# Altium PCB AT89S52多功能板.PcbDoc (part 2 of 5)
Units mm, origin at the board's own origin, x right, y up, seen from the top; angles counter-clockwise.
Board outline 152.4 x 101.6 mm, 2 copper layers (Top Layer, Bottom Layer); 140 components, 143 nets, 570 pads, 50 vias.
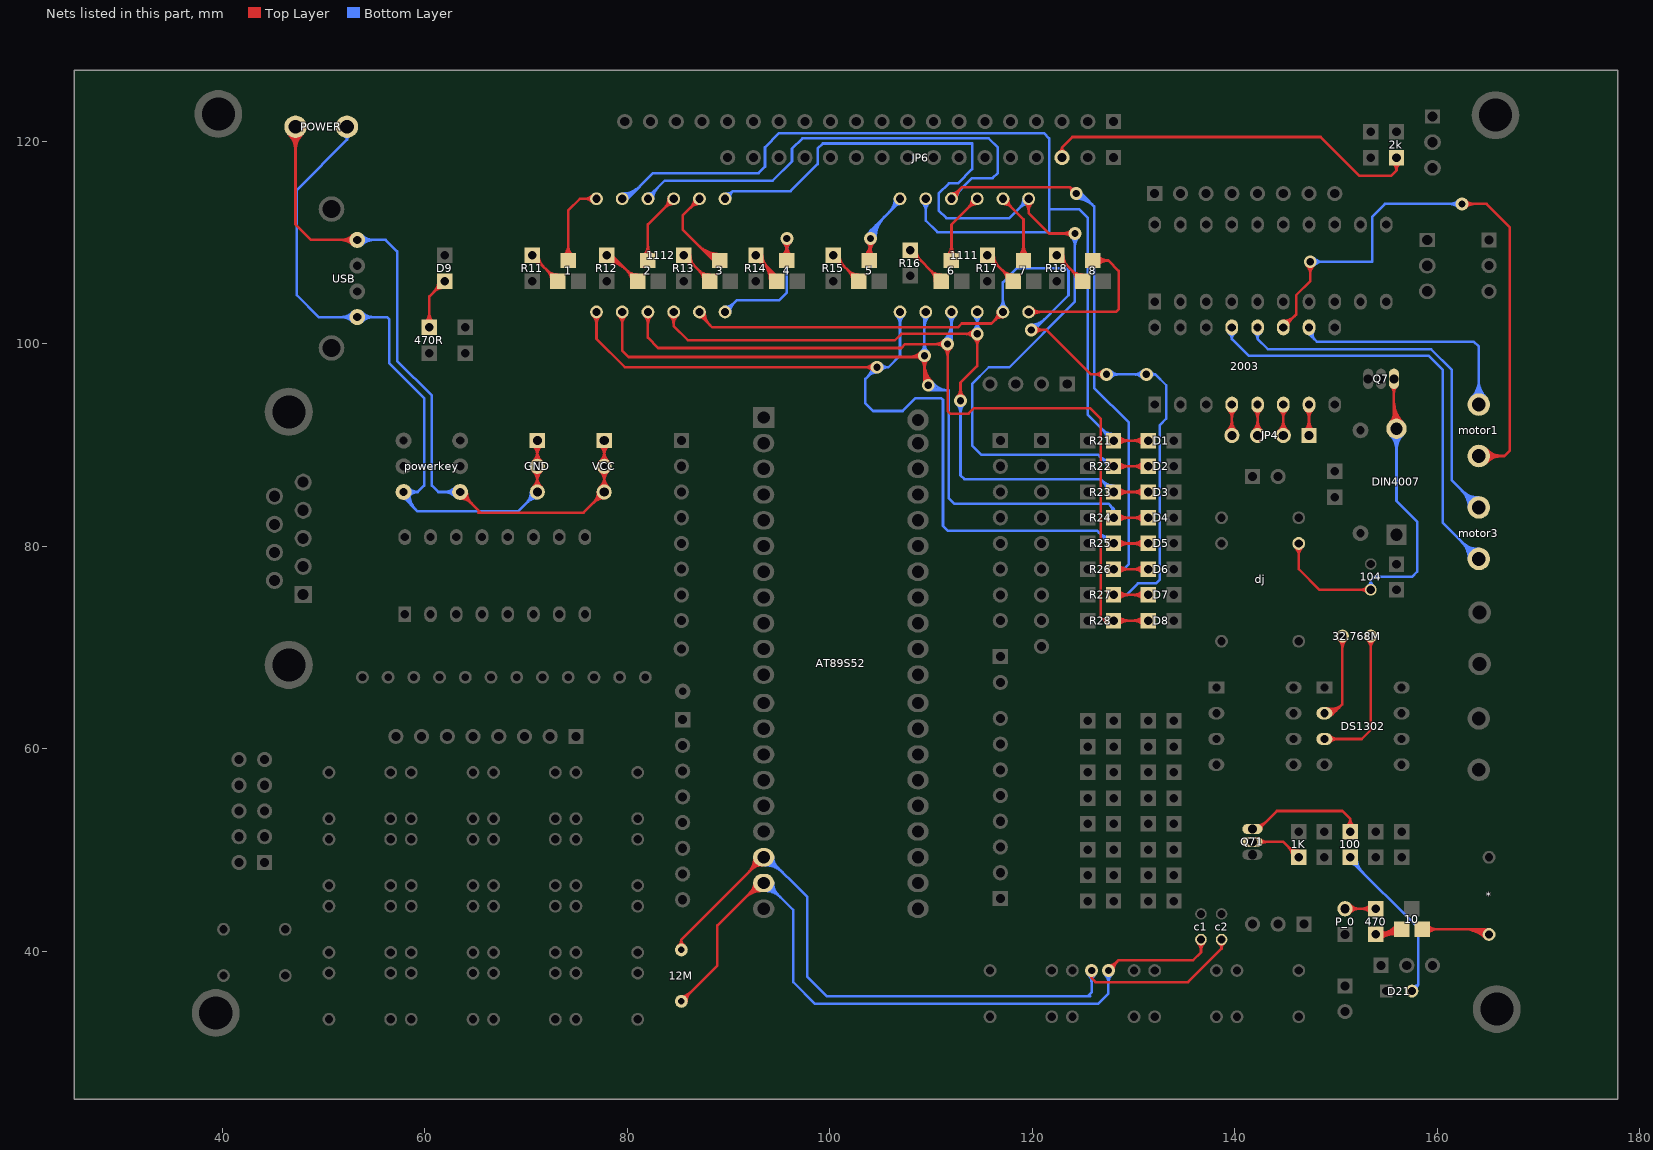
[diagram p2: the nets of this part, all layers, seen from the top]

## Via types
v1: diameter 1.27, hole 0.711, Top Layer to Bottom Layer, 50 vias

## Nets (pads, with @x,y where several pads share a name; then routed paths per layer and width w, separated by ;. In a path a pad name is that pad's centre, name@x,y a point inside that pad or via, vN(x,y) a via of type N, cw(c..) or ccw(c..) an arc to the next point about the centre after c; other vN are vias at no path point) (continued)
Net1_b: 1.B R11.2 | length 11.3
  Top Layer w0.254: R11.2@70.612,108.077 cw(c70.612,106.544) 71.696,107.628 cw(c72.78,108.712) R11.2@71.247,108.712 ; R11.2@70.612,108.331 cw(c70.612,107.411) 71.262,108.062 cw(c71.913,108.712) R11.2@70.993,108.712 ; R11.2@70.612,108.712 1.B@73.152,106.172 ; 1.B@72.517,106.172 ccw(c70.984,106.172) 72.068,107.256 ccw(c73.152,108.34) 1.B@73.152,106.807 ; 1.B@72.771,106.172 ccw(c71.851,106.172) 72.502,106.822 ccw(c73.152,107.473) 1.B@73.152,106.553
Net1_c: 1.C 1112.12 | length 14
  Top Layer w0.254: 1.C@73.719,108.653 ccw(c72.635,109.737) 74.168,109.737 ccw(c75.701,109.737) 1.C@74.617,108.653 ; 1.C@73.899,108.473 ccw(c73.248,109.124) 74.168,109.124 ccw(c75.088,109.124) 1.C@74.437,108.473 ; 1.C@74.168,108.204 74.168,113.157 75.311,114.3 1112.12@76.962,114.3 ; 1112.12@76.603,113.941 ccw(c75.736,113.074) 75.736,114.3 ccw(c75.736,115.526) 1112.12@76.603,114.659
Net1K_2: 1K.2 Q71.2 | length 10.5
  Top Layer w0.254: Q71.2@141.732,50.8 144.78,50.8 1K.2@146.304,49.276 ; Q71.2@142.496,50.536 cw(c143.132,49.9) 143.132,50.8 cw(c143.132,51.7) Q71.2@142.496,51.064 ; 1K.2@145.669,49.276 ccw(c144.136,49.276) 145.22,50.36 ccw(c146.304,51.444) 1K.2@146.304,49.911 ; 1K.2@145.923,49.276 ccw(c145.003,49.276) 145.654,49.926 ccw(c146.304,50.577) 1K.2@146.304,49.657
Net2_b: 2.B R12.2 | length 13
  Top Layer w0.254: R12.2@77.978,108.077 cw(c77.978,105.318) 79.929,107.269 ; R12.2@77.978,108.331 cw(c77.978,106.185) 79.496,107.702 ; R12.2@77.978,108.585 cw(c77.978,107.052) 79.062,108.136 ; R12.2@77.978,108.712 78.486,108.712 2.B@81.026,106.172 ; 2.B@80.391,106.172 ccw(c78.858,106.172) 79.942,107.256 ccw(c81.026,108.34) 2.B@81.026,106.807 ; 2.B@80.645,106.172 ccw(c79.725,106.172) 80.376,106.822 ccw(c81.026,107.473) 2.B@81.026,106.553
Net2_c: 2.C 1112.9 | length 12.9
  Top Layer w0.254: 2.C@81.593,108.653 ccw(c80.509,109.737) 82.042,109.737 ccw(c83.575,109.737) 2.C@82.491,108.653 ; 2.C@81.773,108.473 ccw(c81.122,109.124) 82.042,109.124 ccw(c82.962,109.124) 2.C@82.311,108.473 ; 2.C@82.042,108.204 82.042,111.76 1112.9@84.582,114.3 ; 1112.9@84.074,114.3 cw(c82.848,114.3) 83.715,113.433 cw(c84.582,112.566) 1112.9@84.582,113.792
Net2k_2: 2k.2 JP6.3 | length 41.6
  Top Layer w0.254: JP6.3@122.936,118.364 122.936,119.38 ; 2k.2@155.575,117.856 cw(c155.004,117.094) 155.956,117.094 ; 2k.2@155.956,118.364 155.956,117.094 ; 2k.2@156.337,117.856 ccw(c156.908,117.094) 155.956,117.094 ; 122.936,119.38 ccw(c123.453,119.38) 123.219,118.919 cw(c123.453,119.38) 122.936,119.38 ; 122.936,119.38 cw(c122.419,119.38) 122.653,118.919 ccw(c122.419,119.38) 122.936,119.38 ; 122.936,119.38 123.952,120.396 148.463,120.396 152.273,116.586 155.448,116.586 155.956,117.094
Net3_b: 3.B R13.2 | length 11.3
  Top Layer w0.254: R13.2@85.598,108.077 cw(c85.598,106.544) 86.682,107.628 cw(c87.766,108.712) R13.2@86.233,108.712 ; R13.2@85.598,108.331 cw(c85.598,107.411) 86.248,108.062 cw(c86.899,108.712) R13.2@85.979,108.712 ; R13.2@85.598,108.712 3.B@88.138,106.172 ; 3.B@87.503,106.172 ccw(c85.97,106.172) 87.054,107.256 ccw(c88.138,108.34) 3.B@88.138,106.807 ; 3.B@87.757,106.172 ccw(c86.837,106.172) 87.488,106.822 ccw(c88.138,107.473) 3.B@88.138,106.553
Net3_c: 3.C 1112.8 | length 17.3
  Top Layer w0.254: 1112.8@86.614,114.3 cw(c85.388,114.3) 86.255,113.433 cw(c87.122,112.566) 1112.8@87.122,113.792 ; 86.986,109.737 ccw(c89.154,111.905) 3.C@89.154,108.839 ; 1112.8@87.122,114.3 85.471,112.649 85.471,111.252 88.519,108.204 3.C@89.154,108.204 ; 87.42,109.303 ccw(c89.154,111.038) 3.C@89.154,108.585 ; 87.853,108.87 ccw(c89.154,110.171) 3.C@89.154,108.331 ; 88.287,108.436 ccw(c89.154,109.303) 3.C@89.154,108.077
Net4_b: 4.B R14.2 | length 12.8
  Top Layer w0.254: R14.2@92.71,108.077 cw(c92.71,106.544) 93.794,107.628 cw(c94.878,108.712) R14.2@93.345,108.712 ; R14.2@92.71,108.204 R14.2@92.71,108.712 94.742,106.68 4.B@94.742,106.172 ; R14.2@92.71,108.331 cw(c92.71,107.411) 93.36,108.062 cw(c94.011,108.712) R14.2@93.091,108.712 ; R14.2@93.299,108.123 cw(c91.348,106.172) 4.B@94.107,106.172 ; 93.732,107.69 cw(c92.215,106.172) 4.B@94.361,106.172 ; 94.166,107.256 cw(c93.082,106.172) 4.B@94.615,106.172
Net4_c: 4.C 1112.6 | length 24
  Top Layer w0.254: 4.C@95.309,108.653 ccw(c94.225,109.737) 95.758,109.737 ccw(c97.291,109.737) 4.C@96.207,108.653 ; v1@95.399,110.004 cw(c94.532,109.137) 95.758,109.137 cw(c96.984,109.137) v1@96.117,110.004 ; 4.C@95.489,108.473 ccw(c94.838,109.124) 95.758,109.124 ccw(c96.678,109.124) 4.C@96.027,108.473 ; 4.C@95.758,108.204 v1(95.758,110.363)
  Bottom Layer w0.254: 1112.6@89.662,103.124 90.805,104.267 94.996,104.267 95.758,105.029 v1(95.758,110.363) ; 1112.6@89.662,103.632 ccw(c89.662,104.858) 90.529,103.991 ccw(c91.396,103.124) 1112.6@90.17,103.124 ; v1@95.399,110.004 cw(c94.532,109.137) 95.758,109.137 cw(c96.984,109.137) v1@96.117,110.004
Net5_b: 5.B R15.2 | length 11.3
  Top Layer w0.254: R15.2@100.33,108.077 cw(c100.33,106.544) 101.414,107.628 cw(c102.498,108.712) R15.2@100.965,108.712 ; R15.2@100.33,108.331 cw(c100.33,107.411) 100.98,108.062 cw(c101.631,108.712) R15.2@100.711,108.712 ; R15.2@100.33,108.712 5.B@102.87,106.172 ; 5.B@102.235,106.172 ccw(c100.702,106.172) 101.786,107.256 ccw(c102.87,108.34) 5.B@102.87,106.807 ; 5.B@102.489,106.172 ccw(c101.569,106.172) 102.22,106.822 ccw(c102.87,107.473) 5.B@102.87,106.553
Net5_c: 5.C 1111.12 | length 23.7
  Top Layer w0.254: 5.C@103.437,108.653 ccw(c102.046,110.044) v1@104.013,110.044 ; 5.C@103.617,108.473 ccw(c102.66,109.43) 104.013,109.43 ccw(c105.112,109.43) 5.C@104.335,108.653 ; v1@103.654,110.004 cw(c102.787,109.137) 104.013,109.137 cw(c105.239,109.137) v1@104.372,110.004 ; 5.C@104.013,108.331 v1(104.013,110.363)
  Bottom Layer w0.254: v1@103.759,110.363 cw(c104.985,110.363) 104.118,111.23 ; v1@104.267,110.363 cw(c106.72,110.363) 104.985,112.097 ; v1@104.521,110.363 cw(c107.587,110.363) 105.419,112.531 ; 104.552,111.664 ccw(c105.853,110.363) v1(104.013,110.363) 104.013,111.125 ; 105.887,112.999 ccw(c104.586,114.3) 1111.12@106.426,114.3 ; 106.321,113.433 ccw(c105.454,114.3) 1111.12@106.68,114.3 ; 106.5,113.612 cw(c106.934,113.179) 1111.12@106.934,113.792 ; 1111.12@106.934,114.3 106.934,114.046 104.013,111.125 ; 104.013,111.125 ccw(c104.33,111.125) 104.208,110.832 cw(c104.33,111.125) 104.013,111.125 ; 104.013,111.125 cw(c103.696,111.125) 103.818,110.832 ccw(c103.696,111.125) 104.013,111.125
Net6_b: 6.B R16.2 | length 12
  Top Layer w0.254: R16.2@107.95,108.585 cw(c107.95,107.052) 109.034,108.136 cw(c110.118,109.22) R16.2@108.585,109.22 ; R16.2@107.95,108.839 cw(c107.95,107.919) 108.6,108.57 cw(c109.251,109.22) R16.2@108.331,109.22 ; R16.2@107.95,109.22 6.B@110.998,106.172 ; 6.B@110.363,106.172 ccw(c108.83,106.172) 109.914,107.256 ccw(c110.998,108.34) 6.B@110.998,106.807 ; 6.B@110.617,106.172 ccw(c109.697,106.172) 110.348,106.822 ccw(c110.998,107.473) 6.B@110.998,106.553
Net6_c: 6.C 1111.9 | length 12.9
  Top Layer w0.254: 6.C@111.565,108.653 ccw(c110.481,109.737) 112.014,109.737 ccw(c113.547,109.737) 6.C@112.463,108.653 ; 6.C@111.745,108.473 ccw(c111.094,109.124) 112.014,109.124 ccw(c112.934,109.124) 6.C@112.283,108.473 ; 6.C@112.014,108.204 112.014,111.76 1111.9@114.554,114.3 ; 1111.9@114.046,114.3 cw(c112.82,114.3) 113.687,113.433 cw(c114.554,112.566) 1111.9@114.554,113.792
Net7_b: 7.B R17.2 | length 11.3
  Top Layer w0.254: R17.2@115.57,108.077 cw(c115.57,106.544) 116.654,107.628 cw(c117.738,108.712) R17.2@116.205,108.712 ; R17.2@115.57,108.331 cw(c115.57,107.411) 116.22,108.062 cw(c116.871,108.712) R17.2@115.951,108.712 ; R17.2@115.57,108.712 7.B@118.11,106.172 ; 7.B@117.475,106.172 ccw(c115.942,106.172) 117.026,107.256 ccw(c118.11,108.34) 7.B@118.11,106.807 ; 7.B@117.729,106.172 ccw(c116.809,106.172) 117.46,106.822 ccw(c118.11,107.473) 7.B@118.11,106.553
Net7_c: 7.C 1111.8 | length 12.7
  Top Layer w0.254: 1111.8@117.094,113.792 cw(c117.094,112.566) 117.961,113.433 cw(c118.828,114.3) 1111.8@117.602,114.3 ; 1111.8@117.094,114.3 119.126,112.268 7.C@119.126,108.204 ; 7.C@118.677,108.653 ccw(c117.593,109.737) 119.126,109.737 ccw(c120.659,109.737) 7.C@119.575,108.653 ; 7.C@118.857,108.473 ccw(c118.206,109.124) 119.126,109.124 ccw(c120.046,109.124) 7.C@119.395,108.473
Net8_b: 8.B R18.2 | length 11.3
  Top Layer w0.254: R18.2@122.428,108.077 cw(c122.428,106.544) 123.512,107.628 cw(c124.596,108.712) R18.2@123.063,108.712 ; R18.2@122.428,108.331 cw(c122.428,107.411) 123.078,108.062 cw(c123.729,108.712) R18.2@122.809,108.712 ; R18.2@122.428,108.712 8.B@124.968,106.172 ; 8.B@124.333,106.172 ccw(c122.8,106.172) 123.884,107.256 ccw(c124.968,108.34) 8.B@124.968,106.807 ; 8.B@124.587,106.172 ccw(c123.667,106.172) 124.318,106.822 ccw(c124.968,107.473) 8.B@124.968,106.553
Net8_c: 8.C 1111.6 | length 21.5
  Top Layer w0.254: 1111.6@119.634,103.124 128.27,103.124 128.524,103.378 128.524,107.188 127.508,108.204 ; 1111.6@119.993,102.765 cw(c120.86,101.898) 120.86,103.124 cw(c120.86,104.35) 1111.6@119.993,103.483 ; 8.C@125.984,108.204 127.508,108.204 ; 8.C@126.255,107.936 cw(c126.898,107.297) 126.898,108.204 cw(c126.898,109.111) 8.C@126.255,108.472 ; 8.C@126.435,107.757 cw(c127.508,106.693) 127.508,108.204 ; 8.C@126.435,108.651 ccw(c127.508,109.715) 127.508,108.204
Net10_b: 10.B 470.1 | length 13.4
  Top Layer w0.254: 470.1@154.193,41.387 cw(c154.844,40.736) 154.844,41.656 cw(c154.844,42.576) 470.1@154.193,41.925 ; 470.1@154.373,41.207 cw(c155.457,40.123) 155.457,41.656 cw(c155.457,43.189) 470.1@154.373,42.105 ; 470.1@154.489,41.656 ccw(c154.489,43.914) 10.B@156.179,42.417 ; 155.053,41.656 ccw(c155.053,43.414) 10.B@156.369,42.248 ; 155.617,41.656 ccw(c155.617,42.914) 10.B@156.559,42.08 ; 10.B@155.989,42.585 cw(c153.924,44.414) 470.1@153.924,41.656 155.956,41.656 10.B@156.464,42.164
Net12M_1: 12M.1 AT89S52.19 c1.2 | length 90.4
  Top Layer w0.254: 12M.1@85.344,35.052 88.9,38.608 88.9,42.545 93.091,46.736 AT89S52.19@93.472,46.736 ; 12M.1@85.344,35.56 ccw(c85.344,36.786) 86.211,35.919 ccw(c87.078,35.052) 12M.1@85.852,35.052 ; 91.604,45.249 cw(c93.322,43.531) AT89S52.19@93.322,45.961 ; 92.038,45.683 cw(c93.322,44.398) AT89S52.19@93.322,46.215 ; 92.162,45.807 ccw(c91.232,46.736) AT89S52.19@92.547,46.736 ; 92.471,46.116 cw(c93.322,45.265) AT89S52.19@93.322,46.469 ; v1(127.508,38.1) 128.524,39.116 135.89,39.116 136.652,39.878 c1.2@136.652,41.148 ; v1@127.508,38.608 ccw(c127.508,39.834) 128.375,38.967 ccw(c129.242,38.1) v1@128.016,38.1 ; c1.2@136.338,40.834 cw(c135.579,40.075) 136.652,40.075 cw(c137.725,40.075) c1.2@136.966,40.834
  Bottom Layer w0.254: 12M.1@85.344,35.052 12M.1@85.725,35.052 ; AT89S52.19@93.472,46.736 93.726,46.736 96.393,44.069 96.393,36.957 98.552,34.798 126.492,34.798 127.508,35.814 v1(127.508,38.1) ; AT89S52.19@93.622,45.961 cw(c93.622,43.838) 95.123,45.339 ; AT89S52.19@93.622,46.215 cw(c93.622,44.705) 94.69,45.772 ; AT89S52.19@94.143,46.736 ccw(c95.151,46.736) 94.439,46.023 ; AT89S52.19@94.397,46.736 ccw(c96.018,46.736) 94.872,45.59 ; v1@127.149,37.741 cw(c126.282,36.874) 127.508,36.874 cw(c128.734,36.874) v1@127.867,37.741
Net12M_2: 12M.2 AT89S52.18 c2.2 | length 93.6
  Top Layer w0.254: 12M.2@85.039,40.538 ccw(c84.582,41.148) 85.344,41.148 ; 12M.2@85.344,40.132 85.344,41.148 ; 12M.2@85.649,40.538 cw(c86.106,41.148) 85.344,41.148 ; 91.892,47.696 ccw(c90.312,49.276) AT89S52.18@92.547,49.276 ; 92.254,48.058 cw(c93.322,46.991) AT89S52.18@93.322,48.501 ; 92.326,48.13 ccw(c91.18,49.276) AT89S52.18@92.801,49.276 ; 92.688,48.492 cw(c93.322,47.858) AT89S52.18@93.322,48.755 ; 92.759,48.563 ccw(c92.047,49.276) AT89S52.18@93.055,49.276 ; AT89S52.18@93.472,49.276 85.344,41.148 ; v1(125.857,38.1) 125.857,37.338 ; c2.2@138.684,41.148 138.684,40.259 ; v1@125.662,37.631 cw(c125.54,37.338) 125.857,37.338 ; v1@125.662,37.631 cw(c125.54,37.338) 125.857,37.338 ; v1@125.662,37.631 cw(c125.54,37.338) 125.857,37.338 ; v1@125.662,37.631 cw(c125.54,37.338) 125.857,37.338 ; 125.857,37.338 cw(c126.174,37.338) v1@126.052,37.631 ; 125.857,37.338 cw(c126.174,37.338) v1@126.052,37.631 ; 125.857,37.338 cw(c126.174,37.338) v1@126.052,37.631 ; 125.857,37.338 cw(c126.174,37.338) v1@126.052,37.631 ; 125.857,37.338 126.238,36.957 135.382,36.957 138.684,40.259 ; 138.684,40.259 ccw(c138.017,40.259) 138.417,40.792 cw(c138.017,40.259) 138.684,40.259 ; 138.684,40.259 cw(c139.351,40.259) 138.951,40.792 ccw(c139.351,40.259) 138.684,40.259
  Bottom Layer w0.254: AT89S52.18@93.472,49.276 93.853,49.276 97.79,45.339 97.79,37.465 99.695,35.56 125.73,35.56 ; AT89S52.18@93.622,48.501 cw(c93.622,46.071) 95.34,47.789 ; AT89S52.18@93.622,48.755 cw(c93.622,46.938) 94.906,48.223 ; AT89S52.18@93.622,49.009 cw(c93.622,47.805) 94.473,48.656 ; AT89S52.18@94.397,49.276 ccw(c95.712,49.276) 94.782,48.347 ; 125.476,35.56 125.857,35.941 v1(125.857,38.1) ; v1@125.498,37.741 cw(c124.631,36.874) 125.857,36.874 cw(c127.083,36.874) v1@126.216,37.741
Net100_1: 100.1 D21.2 | length 22.1
  Bottom Layer w0.254: 100.1@151.384,48.641 cw(c151.384,47.721) 152.034,48.372 ; 100.1@151.384,49.276 151.384,49.022 158.115,42.291 158.115,36.703 ; 100.1@151.765,49.276 ccw(c153.298,49.276) 152.214,48.192 ; 100.1@152.019,49.276 ccw(c154.165,49.276) 152.648,47.758 ; D21.2@157.48,36.068 158.115,36.703 ; 158.115,36.703 ccw(c158.497,36.321) 157.973,36.191 cw(c158.497,36.321) 158.115,36.703 ; 158.115,36.703 cw(c157.733,37.085) 157.603,36.561 ccw(c157.733,37.085) 158.115,36.703
Net100_2: 100.2 Q71.3 | length 15.6
  Top Layer w0.254: Q71.3@141.732,52.07 142.367,52.07 144.145,53.848 150.622,53.848 151.384,53.086 ; Q71.3@142.232,52.189 ccw(c142.232,52.802) 142.666,52.369 ; Q71.3@142.232,52.443 ccw(c142.232,53.669) 143.099,52.802 ; Q71.3@142.605,52.07 cw(c143.18,52.07) 142.773,52.476 ; 100.2@151.003,52.324 ccw(c150.432,53.086) 151.384,53.086 ; 100.2@151.384,51.816 151.384,53.086 ; 100.2@151.765,52.324 cw(c152.336,53.086) 151.384,53.086
Net104_2: 104.2 DIN4007.1 dj.6 Q7.3 | length 56
  Top Layer w0.254: dj.6@145.945,79.905 cw(c145.078,79.038) 146.304,79.038 cw(c147.53,79.038) dj.6@146.663,79.905 ; dj.6@146.304,80.264 146.304,77.724 148.336,75.692 104.2@153.416,75.692 ; 104.2@153.102,75.378 ccw(c152.343,74.619) 152.343,75.692 ccw(c152.343,76.765) 104.2@153.102,76.006 ; DIN4007.1@155.339,92.207 ccw(c154.462,93.084) 155.702,93.084 ccw(c157.45,93.084) DIN4007.1@156.214,91.848 ; Q7.3@155.438,95.756 cw(c154.802,95.119) 155.702,95.119 cw(c156.602,95.119) Q7.3@155.966,95.756 ; 155.702,93.698 ccw(c158.064,93.698) DIN4007.1@156.394,92.028 ; 155.702,94.311 ccw(c158.677,94.311) DIN4007.1@156.573,92.207 ; Q7.3@155.702,96.52 155.702,91.844 DIN4007.1@155.956,91.59
  Bottom Layer w0.254: 104.2@153.416,75.692 153.416,76.581 ; DIN4007.1@155.339,90.973 cw(c153.848,89.482) 155.956,89.482 cw(c158.064,89.482) DIN4007.1@156.573,90.973 ; DIN4007.1@155.518,91.152 cw(c154.462,90.096) 155.956,90.096 cw(c157.45,90.096) DIN4007.1@156.394,91.152 ; DIN4007.1@155.956,91.59 155.956,84.455 157.988,82.423 157.988,77.47 157.48,76.962 153.797,76.962 153.416,76.581 ; 153.416,76.581 ccw(c154.083,76.581) 153.683,76.048 cw(c154.083,76.581) 153.416,76.581 ; 153.416,76.581 cw(c152.749,76.581) 153.149,76.048 ccw(c152.749,76.581) 153.416,76.581
Net121_1: 32.768M.1 DS1302.3 | length 18
  Top Layer w0.254: DS1302.3@148.84,60.959 152.526,60.959 153.416,61.849 32.768M.1@153.416,71.12 ; DS1302.3@149.359,60.618 cw(c150.183,59.794) 150.183,60.959 cw(c150.183,62.124) DS1302.3@149.359,61.3 ; 32.768M.1@153.057,70.761 cw(c152.19,69.894) 153.416,69.894 cw(c154.642,69.894) 32.768M.1@153.775,70.761
Net121_2: 32.768M.2 DS1302.2 | length 16.9
  Top Layer w0.254: DS1302.2@148.84,63.499 149.732,63.499 ; DS1302.2@148.953,63.227 ccw(c149.128,63.958) 149.66,63.427 ; DS1302.2@149.012,63.474 ccw(c149.252,64.476) 149.98,63.747 ; DS1302.2@149.071,63.721 ccw(c149.377,64.993) 150.301,64.068 ; DS1302.2@149.131,63.968 ccw(c149.501,65.51) 150.622,64.389 ; 32.768M.2@150.263,70.761 cw(c149.396,69.894) 150.622,69.894 cw(c151.848,69.894) 32.768M.2@150.981,70.761 ; 32.768M.2@150.622,71.12 150.622,64.389 ; 149.732,63.499 ccw(c149.732,63.212) 149.466,63.319 cw(c149.732,63.212) 149.732,63.499 ; 149.732,63.499 cw(c149.732,63.786) 149.466,63.679 ccw(c149.732,63.786) 149.732,63.499 ; 149.732,63.499 150.622,64.389
Net211_1: GND.1 GND.2 GND.3 POWER.2 powerkey.6 USB.1 | length 105.7
  Top Layer w0.254: GND.3@70.679,85.785 ccw(c69.616,86.848) 71.12,86.848 ccw(c72.624,86.848) GND.3@71.561,85.785 ; GND.2@70.679,87.443 cw(c69.616,86.38) 71.12,86.38 cw(c72.624,86.38) GND.2@71.561,87.443 ; GND.2@70.679,88.325 ccw(c69.616,89.388) 71.12,89.388 ccw(c72.624,89.388) GND.2@71.561,88.325 ; GND.1@70.679,89.983 cw(c69.616,88.92) 71.12,88.92 cw(c72.624,88.92) GND.1@71.561,89.983 ; GND.3@70.859,85.605 ccw(c70.229,86.235) 71.12,86.235 ccw(c72.011,86.235) GND.3@71.381,85.605 ; GND.2@70.859,87.623 cw(c70.229,86.993) 71.12,86.993 cw(c72.011,86.993) GND.2@71.381,87.623 ; GND.2@70.859,88.145 ccw(c70.229,88.775) 71.12,88.775 ccw(c72.011,88.775) GND.2@71.381,88.145 ; GND.1@70.859,90.163 cw(c70.229,89.533) 71.12,89.533 cw(c72.011,89.533) GND.1@71.381,90.163 ; GND.3@71.12,85.344 GND.1@71.12,90.424
  Bottom Layer w0.254: POWER.2@52.324,121.412 52.324,120.142 ; USB.1@52.873,102.149 ccw(c51.746,101.022) 51.746,102.616 ccw(c51.746,104.21) USB.1@52.873,103.083 ; USB.1@53.053,102.329 ccw(c52.359,101.635) 52.359,102.616 ccw(c52.359,103.597) USB.1@53.053,102.903 ; USB.1@53.34,102.235 USB.1@53.34,102.616 ; USB.1@53.627,102.329 cw(c54.321,101.635) 54.321,102.616 cw(c54.321,103.597) USB.1@53.627,102.903 ; USB.1@53.807,102.149 cw(c54.934,101.022) 54.934,102.616 cw(c54.934,104.21) USB.1@53.807,103.083 ; powerkey.6@57.912,84.684 cw(c57.912,84.316) 58.172,84.576 ; powerkey.6@58.062,85.319 ccw(c59.111,85.141) 58.359,84.389 ; powerkey.6@58.226,85.086 cw(c58.772,84.638) 58.772,85.344 cw(c58.772,86.05) powerkey.6@58.226,85.602 ; powerkey.6@58.313,85.276 ccw(c59.706,85.041) 58.707,84.041 ; powerkey.6@58.422,84.925 cw(c59.309,84.197) 59.309,85.344 ; powerkey.6@58.422,85.763 ccw(c59.309,86.491) 59.309,85.344 ; powerkey.6@58.563,85.234 ccw(c60.302,84.94) 59.055,83.693 ; GND.3@70.497,85.344 cw(c68.993,85.344) 70.056,84.28 cw(c71.12,83.217) GND.3@71.12,84.721 ; GND.3@70.751,85.344 cw(c69.86,85.344) 70.49,84.714 cw(c71.12,84.084) GND.3@71.12,84.975 ; GND.3@71.12,85.344 69.215,83.439 59.309,83.439 57.912,84.836 powerkey.6@57.912,85.344 59.309,85.344 ; 52.324,120.142 ccw(c51.998,120.142) 52.079,120.458 cw(c51.998,120.142) 52.324,120.142 ; 52.324,120.142 cw(c52.65,120.142) 52.569,120.458 ccw(c52.65,120.142) 52.324,120.142 ; 52.324,120.142 47.371,115.189 47.371,104.775 49.53,102.616 56.261,102.616 56.515,102.362 56.515,98.044 59.944,94.615 59.944,85.979 59.309,85.344
Net211_4: POWER.1 powerkey.1 USB.4 VCC.1 VCC.2 VCC.3 | length 113.2
  Top Layer w0.254: POWER.1@46.548,120.716 cw(c44.866,119.034) 47.244,119.034 cw(c49.622,119.034) POWER.1@47.94,120.716 ; POWER.1@46.727,120.895 cw(c45.479,119.647) 47.244,119.647 cw(c49.009,119.647) POWER.1@47.761,120.895 ; POWER.1@46.907,121.075 cw(c46.092,120.26) 47.244,120.26 cw(c48.396,120.26) POWER.1@47.581,121.075 ; POWER.1@47.244,121.412 47.244,111.76 48.768,110.236 USB.4@53.34,110.236 ; USB.4@52.873,109.769 ccw(c51.746,108.642) 51.746,110.236 ccw(c51.746,111.83) USB.4@52.873,110.703 ; USB.4@53.053,109.949 ccw(c52.359,109.255) 52.359,110.236 ccw(c52.359,111.217) USB.4@53.053,110.523 ; powerkey.1@63.5,84.684 cw(c63.5,83.089) 64.627,84.217 cw(c65.755,85.344) powerkey.1@64.16,85.344 ; powerkey.1@63.5,84.938 cw(c63.5,83.956) 64.194,84.65 cw(c64.888,85.344) powerkey.1@63.906,85.344 ; powerkey.1@63.5,85.09 powerkey.1@63.5,85.344 65.532,83.312 ; 65.278,83.312 75.692,83.312 VCC.3@77.724,85.344 VCC.1@77.724,90.424 ; VCC.3@77.101,85.344 cw(c75.597,85.344) 76.66,84.28 cw(c77.724,83.217) VCC.3@77.724,84.721 ; VCC.3@77.283,85.785 ccw(c76.22,86.848) 77.724,86.848 ccw(c79.228,86.848) VCC.3@78.165,85.785 ; VCC.2@77.283,87.443 cw(c76.22,86.38) 77.724,86.38 cw(c79.228,86.38) VCC.2@78.165,87.443 ; VCC.2@77.283,88.325 ccw(c76.22,89.388) 77.724,89.388 ccw(c79.228,89.388) VCC.2@78.165,88.325 ; VCC.1@77.283,89.983 cw(c76.22,88.92) 77.724,88.92 cw(c79.228,88.92) VCC.1@78.165,89.983 ; VCC.3@77.355,85.344 cw(c76.464,85.344) 77.094,84.714 cw(c77.724,84.084) VCC.3@77.724,84.975 ; VCC.3@77.463,85.605 ccw(c76.833,86.235) 77.724,86.235 ccw(c78.615,86.235) VCC.3@77.985,85.605 ; VCC.2@77.463,87.623 cw(c76.833,86.993) 77.724,86.993 cw(c78.615,86.993) VCC.2@77.985,87.623 ; VCC.2@77.463,88.145 ccw(c76.833,88.775) 77.724,88.775 ccw(c78.615,88.775) VCC.2@77.985,88.145 ; VCC.1@77.463,90.163 cw(c76.833,89.533) 77.724,89.533 cw(c78.615,89.533) VCC.1@77.985,90.163
  Bottom Layer w0.254: USB.4@53.34,110.236 56.134,110.236 57.277,109.093 57.277,98.298 60.706,94.869 60.706,85.979 61.341,85.344 powerkey.1@63.5,85.344 ; USB.4@53.627,109.949 cw(c54.321,109.255) 54.321,110.236 cw(c54.321,111.217) USB.4@53.627,110.523 ; USB.4@53.807,109.769 cw(c54.934,108.642) 54.934,110.236 cw(c54.934,111.83) USB.4@53.807,110.703 ; powerkey.1@63.033,84.877 ccw(c61.906,83.75) 61.906,85.344 ccw(c61.906,86.938) powerkey.1@63.033,85.811 ; powerkey.1@63.213,85.057 ccw(c62.519,84.363) 62.519,85.344 ccw(c62.519,86.325) powerkey.1@63.213,85.631
Net470_2: 470.2 P_0.2 | length 10.7
  Top Layer w0.254: P_0.2@150.876,44.196 470.2@153.924,44.196 ; P_0.2@151.137,43.935 cw(c151.767,43.305) 151.767,44.196 cw(c151.767,45.087) P_0.2@151.137,44.457 ; P_0.2@151.317,43.755 cw(c152.38,42.692) 152.38,44.196 cw(c152.38,45.7) P_0.2@151.317,44.637 ; 470.2@153.475,43.747 ccw(c152.391,42.663) 152.391,44.196 ccw(c152.391,45.729) 470.2@153.475,44.645 ; 470.2@153.655,43.927 ccw(c153.004,43.276) 153.004,44.196 ccw(c153.004,45.116) 470.2@153.655,44.465
Net470R_1: 470R.1 D9.2 | length 12.9
  Top Layer w0.254: 470R.1@60.003,102.049 ccw(c58.919,103.133) 60.452,103.133 ccw(c61.985,103.133) 470R.1@60.901,102.049 ; 470R.1@60.183,101.869 ccw(c59.532,102.52) 60.452,102.52 ccw(c61.372,102.52) 470R.1@60.721,101.869 ; 470R.1@60.452,101.6 60.452,104.648 D9.2@61.976,106.172 ; D9.2@61.341,106.172 cw(c59.808,106.172) 60.892,105.088 cw(c61.976,104.004) D9.2@61.976,105.537 ; D9.2@61.595,106.172 cw(c60.675,106.172) 61.326,105.522 cw(c61.976,104.871) D9.2@61.976,105.791
Net1111_1: 1111.1 1112.1 D5.2 R25.2 | length 105.7
  Top Layer w0.254: 1112.1@76.603,102.765 cw(c75.736,101.898) 76.962,101.898 cw(c78.188,101.898) 1112.1@77.321,102.765 ; 1112.1@76.962,103.124 76.962,100.457 79.756,97.663 v1(104.648,97.663) ; v1@104.289,97.304 ccw(c103.422,96.437) 103.422,97.663 ccw(c103.422,98.889) v1@104.289,98.022 ; R25.2@128.016,80.264 D5.2@131.445,80.264 ; R25.2@128.285,79.995 cw(c128.936,79.344) 128.936,80.264 cw(c128.936,81.184) R25.2@128.285,80.533 ; R25.2@128.465,79.815 cw(c129.549,78.731) 129.549,80.264 cw(c129.549,81.797) R25.2@128.465,80.713 ; D5.2@130.996,79.815 ccw(c129.912,78.731) 129.912,80.264 ccw(c129.912,81.797) D5.2@130.996,80.713 ; D5.2@131.176,79.995 ccw(c130.525,79.344) 130.525,80.264 ccw(c130.525,81.184) D5.2@131.176,80.533
  Bottom Layer w0.254: v1@104.14,97.663 cw(c102.914,97.663) 103.781,96.796 cw(c104.648,95.929) v1@104.648,97.155 ; v1@105.025,97.323 cw(c105.791,96.631) 105.791,97.663 ; v1@105.025,98.003 ccw(c105.791,98.695) 105.791,97.663 ; 1111.1@106.575,102.765 cw(c105.708,101.898) 106.934,101.898 cw(c108.16,101.898) 1111.1@107.293,102.765 ; 1111.1@106.934,103.124 106.934,98.806 105.791,97.663 ; 126.556,81.343 ccw(c127.687,82.475) R25.2@127.923,80.892 ; 126.912,80.987 ccw(c127.78,81.854) R25.2@127.96,80.641 ; 127.201,80.698 cw(c126.768,80.264) R25.2@127.381,80.264 ; R25.2@127.269,80.63 ccw(c127.872,81.233) R25.2@127.997,80.39 ; R25.2@128.016,80.264 127.635,80.264 126.365,81.534 111.633,81.534 111.176,81.991 111.176,94.437 110.998,94.615 108.458,94.615 107.188,93.345 104.267,93.345 103.505,94.107 103.505,96.52 v1(104.648,97.663) 105.791,97.663
Net1111_2: 1111.2 1112.2 D4.2 R24.2 | length 111.9
  Top Layer w0.254: 1112.2@79.143,102.765 cw(c78.276,101.898) 79.502,101.898 cw(c80.728,101.898) 1112.2@79.861,102.765 ; 1112.2@79.502,103.124 79.502,99.314 80.137,98.679 109.22,98.679 v1(109.347,98.806) 109.347,96.266 v1(109.728,95.885) cw(c110.648,96.805) 109.347,96.805 ; 107.814,98.679 ccw(c107.814,100.339) v1@108.988,99.165 ; v1@109.167,98.986 cw(c108.427,99.726) 108.427,98.679 cw(c108.427,97.886) 108.988,98.447 cw(c108.121,97.58) 109.347,97.58 cw(c110.573,97.58) v1@109.706,98.447 ; 109.347,97.418 ccw(c111.261,97.418) v1@109.908,96.065 ; 109.347,98.031 ccw(c111.874,98.031) v1@110.087,96.244 ; R24.2@128.016,82.804 D4.2@131.445,82.804 ; R24.2@128.285,82.535 cw(c128.936,81.884) 128.936,82.804 cw(c128.936,83.724) R24.2@128.285,83.073 ; R24.2@128.465,82.355 cw(c129.549,81.271) 129.549,82.804 cw(c129.549,84.337) R24.2@128.465,83.253 ; D4.2@130.996,82.355 ccw(c129.912,81.271) 129.912,82.804 ccw(c129.912,84.337) D4.2@130.996,83.253 ; D4.2@131.176,82.535 ccw(c130.525,81.884) 130.525,82.804 ccw(c130.525,83.724) D4.2@131.176,83.073
  Bottom Layer w0.254: v1@108.988,99.165 ccw(c108.121,100.032) 109.347,100.032 ccw(c110.573,100.032) v1@109.706,99.165 ; 1111.2@109.115,102.765 cw(c108.554,102.204) 109.347,102.204 cw(c110.394,102.204) 1111.2@109.654,102.944 ; v1(109.347,98.806) 109.347,102.997 1111.2@109.474,103.124 ; 109.347,101.591 cw(c111.007,101.591) 1111.2@109.833,102.765 ; v1@109.525,95.733 ccw(c110.236,96.266) 110.236,95.377 ; v1@109.931,96.037 ccw(c111.252,97.028) 111.252,95.377 ; v1@110.134,96.19 ccw(c111.76,97.409) 111.76,95.377 ; 110.744,95.377 cw(c110.744,96.647) v1(109.728,95.885) 110.236,95.377 ; R24.2@128.016,82.804 128.016,83.693 ; 110.236,95.377 ccw(c110.056,95.197) 109.947,95.427 cw(c110.056,95.197) 110.236,95.377 ; 110.236,95.377 cw(c110.416,95.557) 110.186,95.666 ccw(c110.416,95.557) 110.236,95.377 ; 110.236,95.377 111.76,95.377 ; 111.76,95.377 111.76,84.709 112.268,84.201 127.508,84.201 128.016,83.693 ; 128.016,83.693 ccw(c128.321,83.693) 128.222,83.405 cw(c128.321,83.693) 128.016,83.693 ; 128.016,83.693 cw(c127.711,83.693) 127.81,83.405 ccw(c127.711,83.693) 128.016,83.693 ; 127.625,84.084 cw(c126.795,83.253) 127.897,82.848 ccw(c126.795,83.253) 127.625,84.084 ; 127.906,83.803 cw(c127.205,83.102) 128.135,82.76 ccw(c127.205,83.102) 127.906,83.803
Net1111_3: 1111.3 1112.3 D8.2 R28.2 | length 104.3
  Top Layer w0.254: 1112.3@81.683,102.765 cw(c80.816,101.898) 82.042,101.898 cw(c83.268,101.898) 1112.3@82.401,102.765 ; 1112.3@82.042,103.124 82.042,100.584 83.058,99.568 107.061,99.568 107.442,99.949 v1(111.633,99.949) 111.633,93.345 111.887,93.091 113.701,93.091 114.209,93.599 125.73,93.599 126.746,92.583 126.746,73.025 127.127,72.644 ; v1@111.274,100.308 cw(c110.407,101.175) 110.407,99.949 cw(c110.407,98.723) 111.274,99.59 cw(c110.407,98.723) 111.633,98.723 cw(c112.859,98.723) v1@111.992,99.59 ; R28.2@128.285,72.375 cw(c128.936,71.724) 128.936,72.644 cw(c128.936,73.564) R28.2@128.285,72.913 ; R28.2@128.465,72.195 cw(c129.549,71.111) 129.549,72.644 cw(c129.549,74.177) R28.2@128.465,73.093 ; D8.2@130.996,72.195 ccw(c129.912,71.111) 129.912,72.644 ccw(c129.912,74.177) D8.2@130.996,73.093 ; D8.2@131.176,72.375 ccw(c130.525,71.724) 130.525,72.644 ccw(c130.525,73.564) D8.2@131.176,72.913 ; D8.2@131.445,72.644 127.127,72.644 ; 127.127,72.644 ccw(c127.127,72.949) 127.415,72.85 cw(c127.127,72.949) 127.127,72.644 ; 127.127,72.644 cw(c127.127,72.339) 127.415,72.438 ccw(c127.127,72.339) 127.127,72.644
  Bottom Layer w0.254: v1@111.274,100.308 ccw(c109.487,102.095) 112.014,102.095 ; v1@111.453,100.129 ccw(c110.1,101.482) 112.014,101.482 ; 1111.3@111.655,102.765 cw(c110.788,101.898) 112.014,101.898 cw(c113.24,101.898) 1111.3@112.373,102.765 ; 112.014,100.869 cw(c110.713,100.869) v1(111.633,99.949) 112.014,100.33 1111.3@112.014,103.124
Net1111_4: 1111.4 1112.4 D3.2 R23.2 | length 93.5
  Top Layer w0.254: 1112.4@84.223,102.765 cw(c83.356,101.898) 84.582,101.898 cw(c85.808,101.898) 1112.4@84.941,102.765 ; 1112.4@84.582,103.124 84.582,101.727 85.979,100.33 106.426,100.33 107.061,100.965 v1(114.554,100.965) 114.554,97.79 112.903,96.139 v1(112.903,94.361) ; v1@112.544,94.72 ccw(c111.677,95.587) 112.903,95.587 ccw(c114.129,95.587) v1@113.262,94.72 ; v1@114.195,101.324 cw(c113.328,102.191) 113.328,100.965 cw(c113.328,99.739) 114.195,100.606 cw(c113.328,99.739) 114.554,99.739 cw(c115.78,99.739) v1@114.913,100.606 ; R23.2@128.016,85.09 R23.2@128.016,85.344 D3.2@131.445,85.344 ; R23.2@128.285,85.075 cw(c128.936,84.424) 128.936,85.344 cw(c128.936,86.264) R23.2@128.285,85.613 ; R23.2@128.465,84.895 cw(c129.549,83.811) 129.549,85.344 cw(c129.549,86.877) R23.2@128.465,85.793 ; D3.2@130.996,84.895 ccw(c129.912,83.811) 129.912,85.344 ccw(c129.912,86.877) D3.2@130.996,85.793 ; D3.2@131.176,85.075 ccw(c130.525,84.424) 130.525,85.344 ccw(c130.525,86.264) D3.2@131.176,85.613
  Bottom Layer w0.254: v1@112.544,94.002 cw(c111.677,93.135) 112.903,93.135 cw(c114.129,93.135) v1@113.262,94.002 ; v1(112.903,94.361) 112.903,86.995 113.284,86.614 126.746,86.614 R23.2@128.016,85.344 ; v1@114.195,101.324 ccw(c113.328,102.191) 114.554,102.191 ccw(c115.78,102.191) v1@114.913,101.324 ; 1111.4@114.195,102.765 cw(c113.328,101.898) 114.554,101.898 cw(c115.78,101.898) 1111.4@114.913,102.765 ; v1(114.554,100.965) 1111.4@114.554,103.124 ; R23.2@127.381,85.344 ccw(c125.848,85.344) 126.932,86.428 ccw(c128.016,87.512) R23.2@128.016,85.979 ; R23.2@127.635,85.344 ccw(c126.715,85.344) 127.366,85.994 ccw(c128.016,86.645) R23.2@128.016,85.725
Net1111_5: 1111.5 1112.5 D7.2 R27.2 | length 121.6
  Top Layer w0.254: 1112.5@87.122,102.616 cw(c87.122,102.003) 87.556,102.436 ; 1112.5@87.122,103.124 87.122,102.87 88.392,101.6 112.649,101.6 113.03,101.981 115.951,101.981 1111.5@117.094,103.124 ; 1112.5@87.376,103.124 ccw(c88.602,103.124) 87.735,102.257 ; 1112.5@87.63,103.124 ccw(c89.47,103.124) 88.169,101.823 ; 1111.5@116.586,103.124 cw(c115.36,103.124) 116.227,102.257 cw(c117.094,101.39) 1111.5@117.094,102.616 ; v1(119.888,101.346) 121.412,101.346 125.793,96.965 v1(127.317,96.965) ; v1@120.247,100.987 cw(c121.114,100.12) 121.114,101.346 cw(c121.114,102.572) v1@120.247,101.705 ; v1@126.958,96.605 ccw(c126.091,95.738) 126.091,96.965 ccw(c126.091,98.191) v1@126.958,97.324 ; R27.2@128.016,75.184 D7.2@131.445,75.184 ; R27.2@128.285,74.915 cw(c128.936,74.264) 128.936,75.184 cw(c128.936,76.104) R27.2@128.285,75.453 ; R27.2@128.465,74.735 cw(c129.549,73.651) 129.549,75.184 cw(c129.549,76.717) R27.2@128.465,75.633 ; D7.2@130.996,74.735 ccw(c129.912,73.651) 129.912,75.184 ccw(c129.912,76.717) D7.2@130.996,75.633 ; D7.2@131.176,74.915 ccw(c130.525,74.264) 130.525,75.184 ccw(c130.525,76.104) D7.2@131.176,75.453
  Bottom Layer w0.254: 1111.5@116.735,103.483 ccw(c115.868,104.35) 117.094,104.35 ccw(c118.32,104.35) 1111.5@117.453,103.483 ; 1111.5@117.094,103.124 117.094,106.045 118.491,107.442 123.317,107.442 123.571,107.188 123.571,104.775 120.142,101.346 v1(119.888,101.346) ; v1@119.888,101.6 ccw(c119.888,102.826) 120.755,101.959 ; v1@119.888,101.854 ccw(c119.888,103.694) 121.189,102.393 ; v1@120.396,101.346 cw(c121.009,101.346) 120.576,101.78 ; v1(127.317,96.965) 132.143,96.965 ; v1@127.677,96.605 cw(c128.544,95.738) 128.544,96.965 cw(c128.544,98.191) v1@127.677,97.324 ; R27.2@128.016,75.184 129.286,75.184 ; R27.2@128.524,74.803 cw(c129.286,74.232) 129.286,75.184 ; R27.2@128.524,75.565 ccw(c129.286,76.136) 129.286,75.184 ; v1@130.895,96.605 ccw(c130.028,95.738) 130.028,96.965 ccw(c130.028,98.191) v1@130.895,97.324 ; 129.286,75.184 130.429,76.327 132.207,76.327 132.588,76.708 132.588,91.948 133.223,92.583 133.223,95.885 132.143,96.965 ; 132.143,96.965 ccw(c132.143,96.441) 131.692,96.707 cw(c132.143,96.441) 132.143,96.965 ; 132.143,96.965 cw(c132.143,97.488) 131.692,97.222 ccw(c132.143,97.488) 132.143,96.965
  other v1: 131.255,96.965
Net1111_7: 1111.7 1112.7 D2.2 R22.2 | length 117.2
  Top Layer w0.254: 1111.7@119.275,113.941 cw(c118.408,113.074) 119.634,113.074 cw(c120.86,113.074) 1111.7@119.993,113.941 ; 1111.7@119.634,114.3 119.634,112.903 121.666,110.871 v1(124.206,110.871) ; v1@123.847,110.512 ccw(c122.98,109.645) 122.98,110.871 ccw(c122.98,112.097) v1@123.847,111.23 ; R22.2@128.016,87.884 D2.2@131.445,87.884 ; R22.2@128.285,87.615 cw(c128.936,86.964) 128.936,87.884 cw(c128.936,88.804) R22.2@128.285,88.153 ; R22.2@128.465,87.435 cw(c129.549,86.351) 129.549,87.884 cw(c129.549,89.417) R22.2@128.465,88.333 ; D2.2@130.996,87.435 ccw(c129.912,86.351) 129.912,87.884 ccw(c129.912,89.417) D2.2@130.996,88.333 ; D2.2@131.176,87.615 ccw(c130.525,86.964) 130.525,87.884 ccw(c130.525,88.804) D2.2@131.176,88.153
  Bottom Layer w0.254: 1112.7@89.662,114.3 90.424,115.062 ; 1112.7@89.711,114.806 ccw(c89.795,115.691) 90.424,115.062 ; 1112.7@90.168,114.349 cw(c91.053,114.433) 90.424,115.062 ; 1111.7@119.126,114.3 cw(c117.9,114.3) 118.767,113.433 cw(c119.634,112.566) 1111.7@119.634,113.792 ; 1111.7@119.634,114.3 117.729,112.395 111.506,112.395 110.744,113.157 110.744,114.808 111.76,115.824 112.649,115.824 114.046,117.221 114.046,119.761 99.314,119.761 98.806,119.253 98.806,117.729 96.139,115.062 90.424,115.062 ; v1@123.847,110.512 cw(c122.98,109.645) 124.206,109.645 cw(c125.432,109.645) v1@124.565,110.512 ; v1(124.206,110.871) 124.206,104.14 117.729,97.663 115.697,97.663 114.046,96.012 114.046,89.916 114.935,89.027 126.492,89.027 127.635,87.884 R22.2@128.016,87.884 ; 126.683,88.836 ccw(c127.575,89.729) R22.2@127.868,88.502 ; 127.004,88.515 ccw(c127.699,89.211) R22.2@127.927,88.255 ; 127.201,88.318 cw(c126.768,87.884) R22.2@127.381,87.884
Net1111_10: 1111.10 1112.10 D6.2 R26.2 | length 127.4
  Top Layer w0.254: 1111.10@112.014,114.3 112.014,114.427 113.03,115.443 123.698,115.443 ; 1111.10@112.014,114.808 ccw(c112.014,115.728) 112.664,115.077 ; 1111.10@112.268,114.3 cw(c113.188,114.3) 112.537,114.95 ; 1111.10@112.522,114.3 cw(c114.055,114.3) 112.971,115.384 ; v1(124.333,114.808) 123.698,115.443 ; R26.2@128.016,77.724 D6.2@131.445,77.724 ; R26.2@128.285,77.455 cw(c128.936,76.804) 128.936,77.724 cw(c128.936,78.644) R26.2@128.285,77.993 ; R26.2@128.465,77.275 cw(c129.549,76.191) 129.549,77.724 cw(c129.549,79.257) R26.2@128.465,78.173 ; D6.2@130.996,77.275 ccw(c129.912,76.191) 129.912,77.724 ccw(c129.912,79.257) D6.2@130.996,78.173 ; D6.2@131.176,77.455 ccw(c130.525,76.804) 130.525,77.724 ccw(c130.525,78.644) D6.2@131.176,77.993 ; 123.698,115.443 ccw(c124.08,115.825) 124.21,115.301 cw(c124.08,115.825) 123.698,115.443 ; 123.698,115.443 cw(c123.316,115.061) 123.84,114.931 ccw(c123.316,115.061) 123.698,115.443
  Bottom Layer w0.254: 1112.10@82.042,114.3 82.042,114.427 83.693,116.078 94.361,116.078 96.266,117.983 96.266,119.253 97.282,120.269 115.697,120.269 116.586,119.38 116.586,116.84 116.078,116.332 114.046,116.332 1111.10@112.014,114.3 ; 1112.10@82.042,114.808 ccw(c82.042,115.728) 82.692,115.077 ; 1112.10@82.296,114.3 cw(c83.216,114.3) 82.565,114.95 ; 1112.10@82.55,114.3 cw(c84.083,114.3) 82.999,115.384 ; 1111.10@112.014,114.808 ccw(c112.014,116.034) 112.881,115.167 ccw(c113.748,114.3) 1111.10@112.522,114.3 ; v1@124.333,114.3 cw(c124.333,111.847) 126.067,113.582 ; v1@124.333,114.554 cw(c124.333,112.714) 125.634,114.015 ; 125.2,114.449 ccw(c124.333,113.582) v1(124.333,114.808) 124.841,114.808 126.111,113.538 126.111,95.631 129.54,92.202 129.54,78.232 129.032,77.724 ; R26.2@128.016,77.724 129.032,77.724 ; 129.032,77.724 ccw(c129.032,77.229) 128.587,77.446 cw(c129.032,77.229) 129.032,77.724 ; 129.032,77.724 cw(c129.032,78.219) 128.587,78.002 ccw(c129.032,78.219) 129.032,77.724
Net1111_11: 1111.11 1112.11 D1.2 R21.2 | length 118.7
  Top Layer w0.254: R21.2@128.016,90.424 D1.2@131.445,90.424 ; R21.2@128.285,90.155 cw(c128.936,89.504) 128.936,90.424 cw(c128.936,91.344) R21.2@128.285,90.693 ; R21.2@128.465,89.975 cw(c129.549,88.891) 129.549,90.424 cw(c129.549,91.957) R21.2@128.465,90.873 ; D1.2@130.996,89.975 ccw(c129.912,88.891) 129.912,90.424 ccw(c129.912,91.957) D1.2@130.996,90.873 ; D1.2@131.176,90.155 ccw(c130.525,89.504) 130.525,90.424 ccw(c130.525,91.344) D1.2@131.176,90.693
  Bottom Layer w0.254: 1112.11@79.502,114.554 ccw(c79.502,116.394) 80.803,115.093 ; 1112.11@79.502,114.808 ccw(c79.502,117.261) 81.236,115.526 ; 80.369,114.659 cw(c79.502,115.526) 1112.11@79.502,114.3 80.01,114.3 82.55,116.84 92.964,116.84 93.599,117.475 93.599,119.38 94.996,120.777 121.158,120.777 121.666,120.269 121.666,110.998 110.617,110.998 109.474,112.141 1111.11@109.474,114.3 ; 1111.11@109.115,113.941 cw(c108.248,113.074) 109.474,113.074 cw(c110.7,113.074) 1111.11@109.833,113.941 ; 121.666,113.284 124.587,113.284 125.476,112.395 125.476,92.964 R21.2@128.016,90.424 ; R21.2@127.381,90.424 ccw(c125.848,90.424) 126.932,91.508 ccw(c128.016,92.592) R21.2@128.016,91.059 ; R21.2@127.635,90.424 ccw(c126.715,90.424) 127.366,91.074 ccw(c128.016,91.725) R21.2@128.016,90.805
Net2003_4: 2003.4 JP4.4 | length 8.7
  Top Layer w0.254: JP4.4@139.259,91.373 ccw(c138.196,92.436) 139.7,92.436 ccw(c141.204,92.436) JP4.4@140.141,91.373 ; 2003.4@139.349,93.462 cw(c138.501,92.614) 139.7,92.614 ; JP4.4@139.439,91.193 ccw(c138.809,91.823) 139.7,91.823 ccw(c140.591,91.823) JP4.4@139.961,91.193 ; JP4.4@139.7,90.932 2003.4@139.701,93.976 2003.4@139.701,93.976 ; 139.7,92.609 cw(c140.906,92.609) 2003.4@140.053,93.462
Net2003_5: 2003.5 JP4.3 | length 8.7
  Top Layer w0.254: JP4.3@141.799,91.373 ccw(c140.733,92.439) 142.241,92.439 ; 2003.5@141.889,93.462 cw(c141.039,92.612) 142.241,92.612 cw(c143.443,92.612) 2003.5@142.593,93.462 ; JP4.3@141.979,91.193 ccw(c141.347,91.825) 142.241,91.825 ; JP4.3@142.24,90.932 JP4.3@142.24,90.932 2003.5@142.241,93.976 ; 142.241,91.82 ccw(c143.128,91.82) JP4.3@142.501,91.193 ; 142.241,92.434 ccw(c143.742,92.434) JP4.3@142.681,91.373
Net2003_6: 2003.6 JP4.2 | length 8.7
  Top Layer w0.254: JP4.2@144.339,91.373 ccw(c143.273,92.439) 144.781,92.439 ; 2003.6@144.429,93.462 cw(c143.579,92.612) 144.781,92.612 cw(c145.983,92.612) 2003.6@145.133,93.462 ; JP4.2@144.519,91.193 ccw(c143.887,91.825) 144.781,91.825 ; JP4.2@144.78,90.932 JP4.2@144.78,90.932 2003.6@144.781,93.976 ; 144.781,91.82 ccw(c145.668,91.82) JP4.2@145.041,91.193 ; 144.781,92.434 ccw(c146.282,92.434) JP4.2@145.221,91.373
Net2003_7: 2003.7 JP4.1 | length 8.7
  Top Layer w0.254: JP4.1@146.879,91.373 ccw(c145.813,92.439) 147.321,92.439 ; 2003.7@146.969,93.462 cw(c146.119,92.612) 147.321,92.612 cw(c148.523,92.612) 2003.7@147.673,93.462 ; JP4.1@147.059,91.193 ccw(c146.427,91.825) 147.321,91.825 ; JP4.1@147.32,90.932 JP4.1@147.32,90.932 2003.7@147.321,93.976 ; 147.321,91.82 ccw(c148.208,91.82) JP4.1@147.581,91.193 ; 147.321,92.434 ccw(c148.822,92.434) JP4.1@147.761,91.373
Net2003_10: 2003.10 motor1.2 | length 33.5
  Bottom Layer w0.254: 2003.10@147.321,101.596 147.321,100.964 148.082,100.203 163.576,100.203 164.084,99.695 motor1.2@164.084,93.98 ; 2003.10@147.532,101.311 ccw(c147.988,101.044) 147.614,100.671 ; 2003.10@147.751,101.183 ccw(c148.282,100.873) 147.847,100.438 ; motor1.2@163.388,94.676 ccw(c161.706,96.358) 164.084,96.358 ccw(c166.462,96.358) motor1.2@164.78,94.676 ; motor1.2@163.567,94.497 ccw(c162.319,95.745) 164.084,95.745 ccw(c165.849,95.745) motor1.2@164.601,94.497 ; motor1.2@163.747,94.317 ccw(c162.932,95.132) 164.084,95.132 ccw(c165.236,95.132) motor1.2@164.421,94.317
Net2003_11: 2003.11 motor1.1 | length 77.7
  Top Layer w0.254: 2003.11@144.781,101.596 146.05,102.865 146.05,104.775 147.447,106.172 v1(147.447,108.077) ; 2003.11@144.781,102.003 ccw(c144.781,102.984) 145.475,102.29 ; 2003.11@144.781,102.257 ccw(c144.781,103.851) 145.908,102.724 ; 2003.11@145.279,101.759 cw(c146.089,101.759) 145.516,102.332 ; v1@147.088,107.718 cw(c146.221,106.851) 147.447,106.851 cw(c148.673,106.851) v1@147.806,107.718 ; v1(162.433,113.792) 164.846,113.792 167.132,111.506 167.132,89.408 166.624,88.9 motor1.1@164.084,88.9 ; v1@162.792,113.433 cw(c163.659,112.566) 163.659,113.792 cw(c163.659,115.018) v1@162.792,114.151 ; motor1.1@164.421,88.563 cw(c165.236,87.748) 165.236,88.9 cw(c165.236,90.052) motor1.1@164.421,89.237 ; motor1.1@164.601,88.383 cw(c165.849,87.135) 165.849,88.9 cw(c165.849,90.665) motor1.1@164.601,89.417 ; motor1.1@164.78,88.204 cw(c166.462,86.522) 166.462,88.9 cw(c166.462,91.278) motor1.1@164.78,89.596
  Bottom Layer w0.254: 2003.11@144.781,101.596 2003.11@144.781,102.109 ; v1(147.447,108.077) 153.543,108.077 153.543,112.522 154.813,113.792 v1(162.433,113.792) ; v1@147.806,107.718 cw(c148.673,106.851) 148.673,108.077 cw(c148.673,109.303) v1@147.806,108.436 ; v1@162.074,113.433 ccw(c161.207,112.566) 161.207,113.792 ccw(c161.207,115.018) v1@162.074,114.151
Net2003_12: 2003.12 motor3.2 | length 47.3
  Bottom Layer w0.254: 2003.12@142.241,101.596 142.241,100.456 ; motor3.2@163.099,83.82 ccw(c160.721,83.82) 162.403,85.501 ccw(c164.084,87.183) motor3.2@164.084,84.805 ; motor3.2@163.353,83.82 ccw(c161.588,83.82) 162.836,85.068 ccw(c164.084,86.316) motor3.2@164.084,84.551 ; motor3.2@163.607,83.82 ccw(c162.455,83.82) 163.27,84.634 ccw(c164.084,85.449) motor3.2@164.084,84.297 ; motor3.2@164.084,83.82 161.417,86.487 161.417,97.409 159.385,99.441 143.256,99.441 142.241,100.456 ; 142.241,100.456 ccw(c141.53,100.456) 141.948,101.031 cw(c141.53,100.456) 142.241,100.456 ; 142.241,100.456 cw(c142.952,100.456) 142.534,101.031 ccw(c142.952,100.456) 142.241,100.456
Net2003_13: 2003.13 motor3.1 | length 54.4
  Bottom Layer w0.254: 2003.13@139.701,101.596 139.701,100.456 ; motor3.1@163.099,78.74 ccw(c160.721,78.74) 162.403,80.421 ccw(c164.084,82.103) motor3.1@164.084,79.725 ; motor3.1@163.353,78.74 ccw(c161.588,78.74) 162.836,79.988 ccw(c164.084,81.236) motor3.1@164.084,79.471 ; motor3.1@163.607,78.74 ccw(c162.455,78.74) 163.27,79.554 ccw(c164.084,80.369) motor3.1@164.084,79.217 ; motor3.1@164.084,78.74 160.528,82.296 160.528,97.409 159.131,98.806 141.351,98.806 139.701,100.456 ; 139.701,100.456 ccw(c138.99,100.456) 139.408,101.031 cw(c138.99,100.456) 139.701,100.456 ; 139.701,100.456 cw(c140.412,100.456) 139.994,101.031 ccw(c140.412,100.456) 139.701,100.456
Net*_1: 10.E *.1 | length 18.3
  Top Layer w0.254: 10.E@158.496,42.164 164.592,42.164 ; 10.E@158.765,41.895 cw(c159.416,41.244) 159.416,42.164 cw(c159.416,43.084) 10.E@158.765,42.433 ; 10.E@158.945,41.715 cw(c160.029,40.631) 160.029,42.164 cw(c160.029,43.697) 10.E@158.945,42.613 ; 162.647,42.164 cw(c162.647,39.203) *.1@164.741,41.297 ; 163.26,42.164 cw(c163.26,39.816) *.1@164.92,41.476 ; 163.874,42.164 cw(c163.874,40.43) *.1@165.1,41.656 164.592,42.164 ; 164.487,42.164 cw(c164.487,41.043) *.1@165.28,41.836 ; 164.592,42.164 ccw(c164.772,42.344) 164.881,42.114 cw(c164.772,42.344) 164.592,42.164 ; 164.592,42.164 cw(c164.412,41.984) 164.642,41.875 ccw(c164.412,41.984) 164.592,42.164